# Altium PCB Atmega328P_Shield.PcbDoc
Units mm, origin at the board's own origin, x right, y up, seen from the top; angles counter-clockwise.
Board outline 41.91 x 28.96 mm, 2 copper layers (Top Layer, Bottom Layer); 12 components, 8 nets, 32 pads, 0 vias.
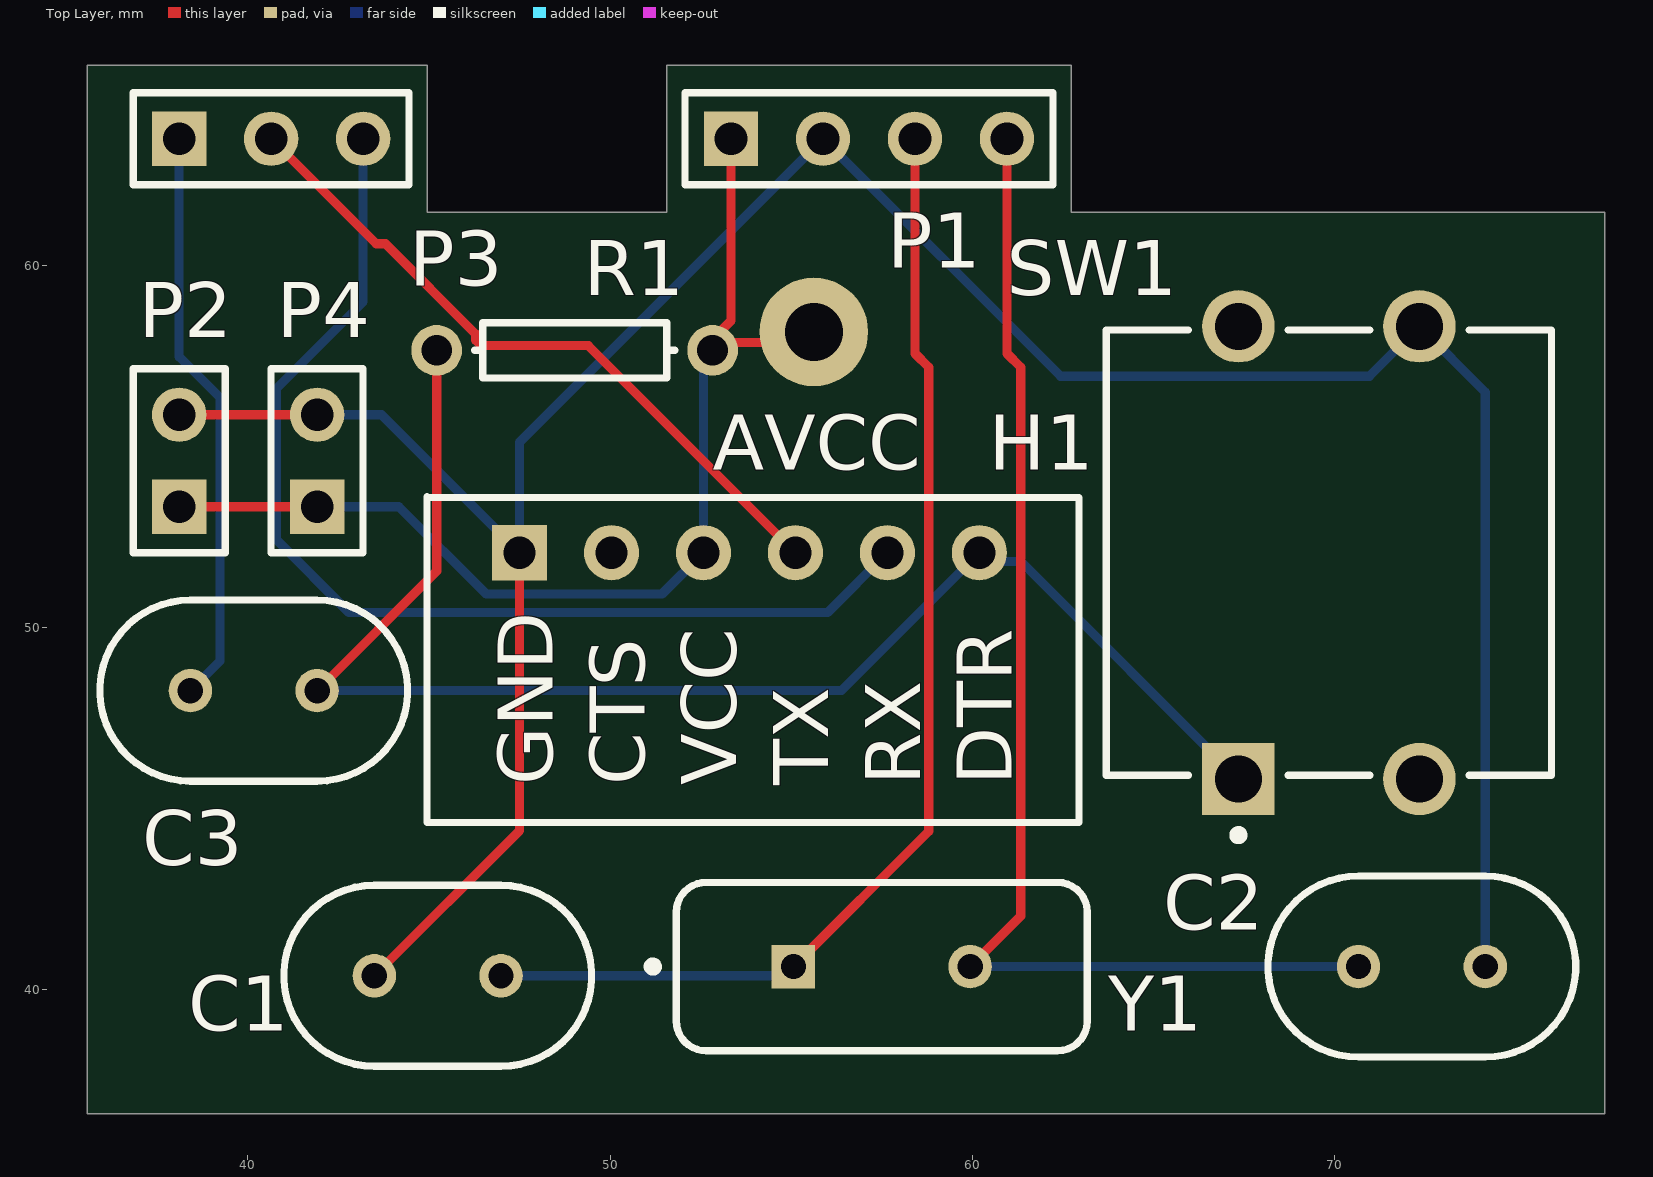
[diagram p0: Top Layer view]
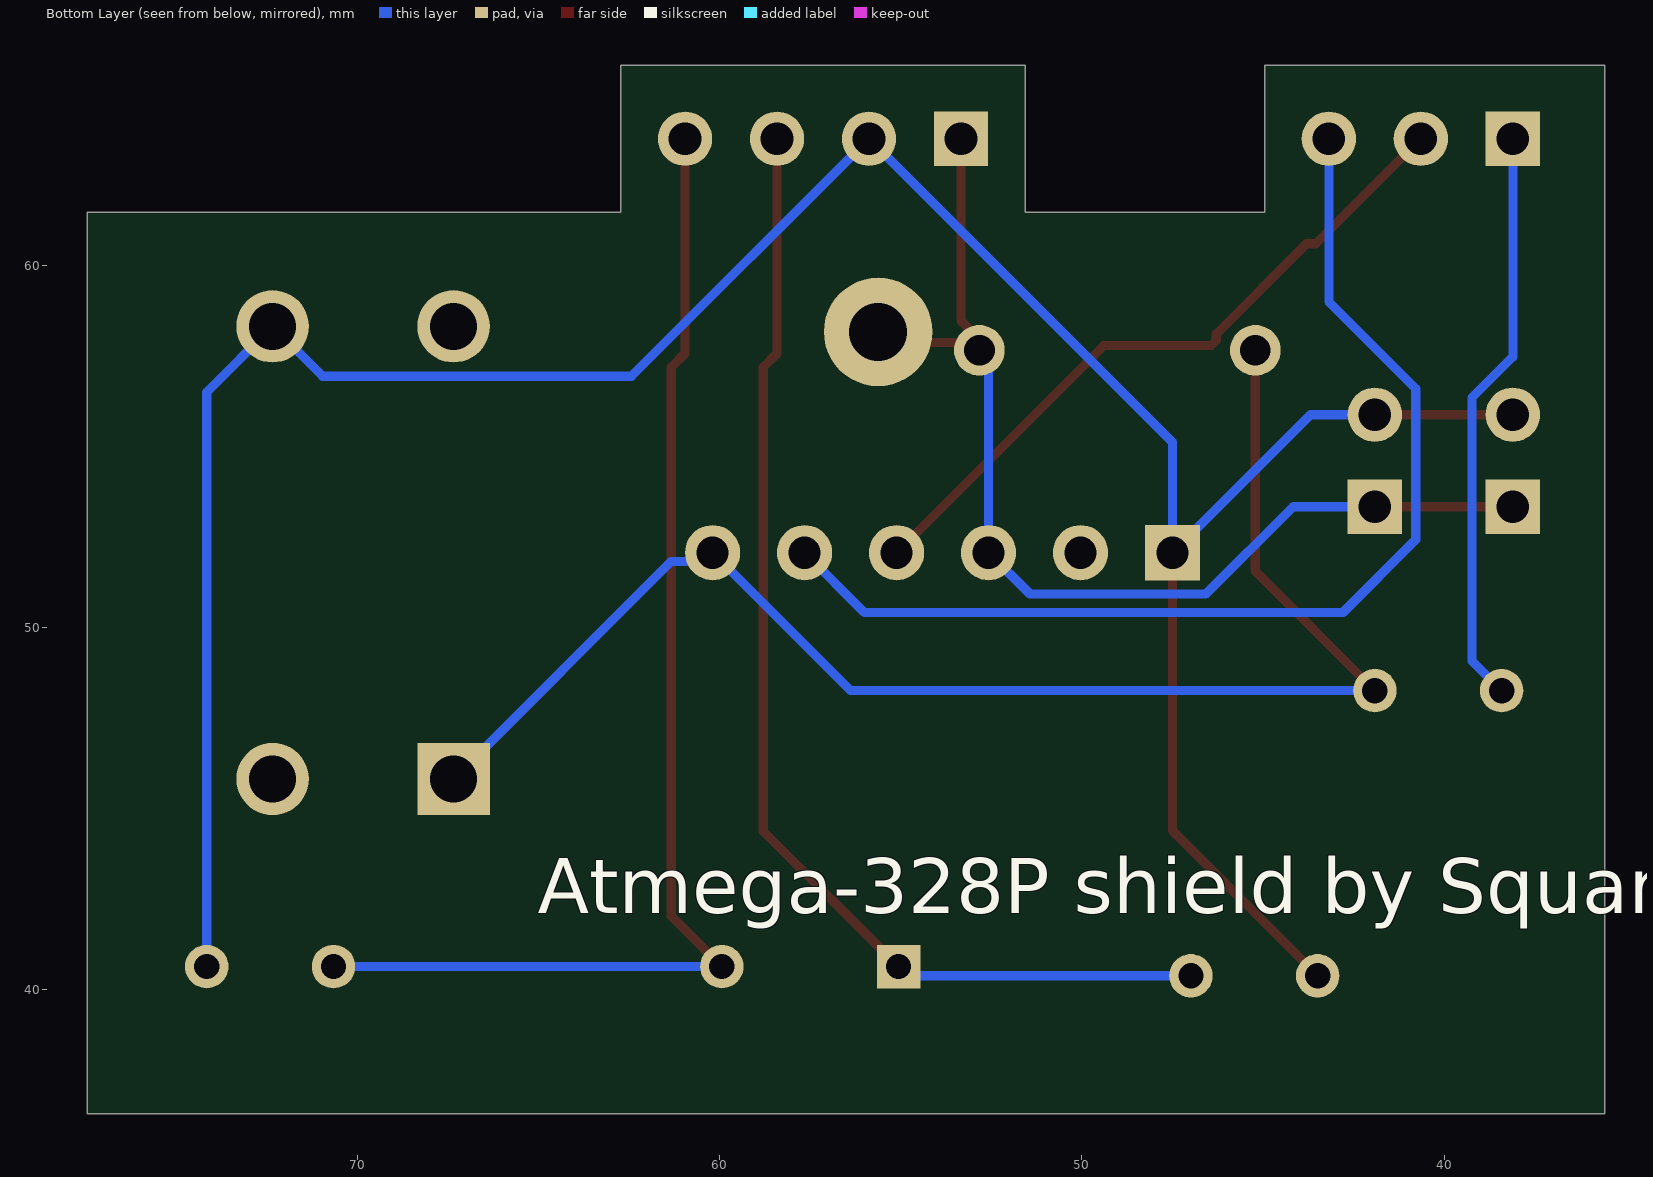
[diagram p1: Bottom Layer view, seen from below]

## Layer stack, top to bottom
Top Solder: solder mask 0.0102, Solder Resist, Dk 3.5
Top Layer: signal copper 0.0356
Dielectric 1: dielectric 0.32, FR-4, Dk 4.8
Bottom Layer: signal copper 0.0356
Bottom Solder: solder mask 0.0102, Solder Resist, Dk 3.5

## Board outline
35.56,36.576 35.56,65.532 44.958,65.532 44.958,61.468 51.562,61.468 51.562,65.532 62.738,65.532 62.738,61.468 77.47,61.468 77.47,36.576

## Design rules (kind name [scope] priority, off if disabled: settings)
Clearance [All] p1: gap=0.254 ignorepadtopadclearanceinfootprint=FALSE except(0: Arc-Hole Track-Hole SMDPad-Hole THPad-Hole Via-Hole Fill-Hole Poly-Hole Region-Hole Text-Hole)
PolygonConnect [All] p1: connectstyle=Relief reliefconductorwidth=0.254 reliefentries=4 polygonreliefangle="90 Angle" airgapwidth=0.254
RoomDefinition Atmega328P_Shield [InComponentClass('Atmega328P_Shield')] p1: confinementstyle=ConfineIn formatcopy=TRUE lockcomponents=FALSE outline 25.4,25.4 120.65,25.4 120.65,100.513 25.4,100.513
RoutingVias [All] p1: holewidth=0.711 width=1.27 viastyle="Through Hole" minholewidth=0.711 minwidth=1.27 maxholewidth=0.711 maxwidth=1.27
SolderMaskExpansion [All] p1: expansion=0.102 istentingtop=FALSE
Width [All] p1: maxlimit=0.254 minlimit=0.254 preferedwidth=0.254
30 further rules are at their usual default settings.

## Components (designator, comment, footprint, x,y, rotation, side; value= is the part's Value field where it differs from the comment)
AVCC "AVCC" TEST_POINT 55.626,58.166 r0 top (schematic designator TP1)
C1 "22pF" "Ceramic Capacitor" 43.49,40.386 r0 top
C2 "22pF" "Ceramic Capacitor" 74.168,40.64 r180 top
C3 "100nF" "Ceramic Capacitor" 41.91,48.26 r180 top
H1 "USB_TTL_6_socket" "TTL USB (6 SOCKETS)" 47.498,52.07 r90 top
P1 "crystal connection" HDR1X4 53.34,63.5 r0 top locked
P2 "Power rail" HDR1X2 38.1,53.34 r90 top locked
P3 "Serial comm" HDR1X3 38.1,63.5 r0 top locked
P4 "Power rail (offsetted)" HDR1X2 41.91,53.34 r90 top locked
R1 "Res1" AXIAL-0.3 49.022,57.658 r180 top value=10K
SW1 "FSM103" FP-FSM103-MFG 69.85,52.07 r270 top
Y1 "FOXSLF/160-20" FOX-FOXSLF160-20 57.504,40.64 r0 top

## Footprints (in the part's own frame and the unit in brackets; to place one, negate y for a bottom-side part, rotate by r counter-clockwise, add the part's x,y. Pads: shape width x height; smd on the part's side, far side on the other; paste and mask are expansions set on the pad)
AXIAL-0.3 [mm] "Axial Device, Thru-Hole; 2 Leads; 0.3 in Pin Spacing"
  round 1.4 hole 0.85: 1(-3.81,0) 2(3.81,0)
  silkscreen extent -2.77,-0.76 2.77,0.76
"Ceramic Capacitor" [mm]
  round 1.2 hole 0.7: 1(0,0) 2(3.5,0)
  silkscreen extent -2.5,-2.5 6,2.5
FOX-FOXSLF160-20 [mm] "THD, 2-Leads, Body 11.35x4.65mm"
  rect 1.2x1.2 hole 0.7: 1(-2.44,0)
  round 1.2 hole 0.7: 2(2.44,0)
  silkscreen extent -6.45,-2.32 5.68,2.32, body extent -5.67,-2.32 5.68,2.33, height 3.6
FP-FSM103-MFG [mm]
  rect 2x2 hole 1.3 paste-1000 mask+0: 1(6.25,-2.5)
  round 2 hole 1.3 paste-1000 mask+0: 2(-6.25,-2.5) 3(6.25,2.5) 4(-6.25,2.5)
  silkscreen extent -6.15,-6.15 7.92,6.15, body extent -7.35,-6.25 7.35,6.25, height 0.25
HDR1X2 [mm] "Connector; Header; 2 Position"
  rect 1.5x1.5 hole 0.9: 1(0,0)
  round 1.5 hole 0.9: 2(2.54,0)
  silkscreen extent -1.27,-1.27 3.81,1.27
HDR1X3 [mm] "Connector; Header; 3 Position"
  rect 1.5x1.5 hole 0.9: 1(0,0)
  round 1.5 hole 0.9: 2(2.54,0) 3(5.08,0)
  silkscreen extent -1.27,-1.27 6.35,1.27
HDR1X4 [mm] "Connector; Header; 4 Position"
  rect 1.5x1.5 hole 0.9: 1(0,0)
  round 1.5 hole 0.9: 2(2.54,0) 3(5.08,0) 4(7.62,0)
  silkscreen extent -1.27,-1.27 8.89,1.27
TEST_POINT [mm]
  round 3 hole 1.6: 1(0,0)
"TTL USB (6 SOCKETS)" [mil]
  rect 60x60 hole 35: 1(0,0)
  round 60 hole 35: 2(0,-100) 3(0,-200) 4(0,-300) 5(0,-400) 6(0,-500)
  silkscreen extent -293,-608 61,100

## Part data
AVCC: library part Testpoint, "Polyurethane Multi-Purpose Cream Adhesive, 10.3 oz Cartridge", Color=Red, Flammability Rating="UL94 V-0", Manufacturer="Keystone Electronics", Manufacturer Part Number=5010, Package Quantity=100, Supplier Part Number 1=36-5010-ND, Body Material=Bronze,PBT, Category=Connectors, ComponentLink1Description=https://datasheet.ciiva.com/11744/0900766b8009b7c7-11744920.pdf?src-supplier=RSComponents, ComponentLink1URL=https://datasheet.ciiva.com/11744/0900766b8009b7c7-11744920.pdf?src-supplier=RSComponents, ComponentLink2Description=https://datasheet.ciiva.com/16506/m60-2p60-16506972.pdf?src-supplier=Future+Electronics, ComponentLink2URL=https://datasheet.ciiva.com/16506/m60-2p60-16506972.pdf?src-supplier=Future+Electronics, ComponentLink3Description=https://datasheet.ciiva.com/16883/70182825-16883886.pdf?src-supplier=Allied+Electronics, ComponentLink3URL=https://datasheet.ciiva.com/16883/70182825-16883886.pdf?src-supplier=Allied+Electronics, ComponentLink4Description=https://datasheet.ciiva.com/1454/1703983-1454833.pdf?src-supplier=Element14, ComponentLink4URL=https://datasheet.ciiva.com/1454/1703983-1454833.pdf?src-supplier=Element14, ComponentLink5Description=https://datasheet.ciiva.com/22631/1703983-22631113.pdf?src-supplier=Element14, ComponentLink5URL=https://datasheet.ciiva.com/22631/1703983-22631113.pdf?src-supplier=Element14, ComponentLink6Description=https://datasheet.ciiva.com/2917/5010-2917626.pdf?src-supplier=Digi-Key, ComponentLink6URL=https://datasheet.ciiva.com/2917/5010-2917626.pdf?src-supplier=Digi-Key, Contact Material=Bronze, Contact Plating=Silver,Tin, Height=0.445inch, Hole Diameter=1.6mm, Housing Color=Red, Inside Diameter=1.78mm, Insulation Material=Nylon, Lead Free="Lead Free", Length=11.3mm, Material=Nylon,Bronze,Silver, Mount="Through Hole,PCB", Number of Ports=1, Orientation=Straight, Packaging=Bulk, Plating=Silver, Pricing 1="1=0.42000, 25=0.34080, 100=0.30150, 250=0.28304, 500=0.25230, 1000=0.19884, 2500=0.18180, 5000=0.17044 (USD)", REACH SVHC="No SVHC", RoHS=Yes, RoHS Compliant=Yes, Series=THM, Stock 1=546313, Supplier 1=Digi-Key, Termination="Through Hole"
C1 C2 C3: library part capacitor
H1: Supplier Part Number 1=1621310, Supplier 1=Rs
P1: library part "Header 4", "Header, 4-Pin", LatestRevisionDate=17-Jul-2002, LatestRevisionNote="Re-released for DXP Platform.", Publisher="Altium Limited"
P2 P4: library part "Header 2", "Header, 2-Pin", LatestRevisionDate=17-Jul-2002, LatestRevisionNote="Re-released for DXP Platform.", Publisher="Altium Limited"
P3: library part "Header 3", "Header, 3-Pin", LatestRevisionDate=17-Jul-2002, LatestRevisionNote="Re-released for DXP Platform.", Publisher="Altium Limited"
R1: "Resistor", LatestRevisionDate=17-Jul-2002, LatestRevisionNote="Re-released for DXP Platform.", PackageDescription="Axial Device, Thru-Hole; 2 Leads; 0.3 in Pin Spacing", PackageReference=AXIAL-0.3, Published=8-Jun-2000, Publisher="Altium Limited"
SW1: library part CMP-03407-000037-1, "SWITCH TACTILE SPST-NO 0.05A 24V", Actuator Color=Black, Contact Current Rating=50mA, Contact Resistance=100mR, Max Operating Temperature=85°C, Max Voltage Rating (DC)=12V, Min Operating Temperature=-35°C, Operating Force=1.57N, Package Quantity=400, Voltage Rating=24V, Actuator Length=3.4mm, Actuator Material=Polyester, Contact Material=Brass, Contact Plating=Silver, Current Rating=50mA, Depth=14.1mm, Electrical Life=100000Cycles, Illumination Type=Non-Illuminated, Length=12mm, Max Current Rating=50mA, Mechanical Life=100000Cycles, Mount="Through Hole", Orientation=Straight, Packaging="Loose Piece", Radiation Hardening=No, RoHS Compliant=Yes, Series="FSM100 ~ 104", Switch Function=Off-Mom, Switch Travel=0.3mm, Termination="PC Pins", Throw Configuration=SPST, Type=Switch, Voltage Rating (DC)=12V, Width=12mm
Y1: library part CMP-1749-00003-1, "Resistance Weld Thru-Hole Crystal, 16 MHz, -20 to 70 degC, 2-Pin THD, RoHS, Bulk", Case\Package=Axial, Max Operating Temperature="155 degC", Min Operating Temperature="-55 degC", Package Quantity=200, Power Rating="250 mW", Resistance="221 kohm", Tolerance=1%, Voltage Rating="250 V", ComponentLink1Description="Manufacturer URL", ComponentLink1URL=http://www.foxonline.com/, ComponentLink2Description=Datasheet, ComponentLink2URL=http://www.foxonline.com/pdfs/hc49slf.pdf, DatasheetVersion=Mar-15, Length="0.248 inch", Mount="Through Hole", PackageDescription="2-Pin Through Hole Device, Body 11.35 x 4.65 mm", PackageReference=FOXSLF160-20, Packaging=Bulk, RoHSCompliant=true

## Nets (pads, with @x,y where several pads share a name; then routed paths per layer and width w, separated by ;. In a path a pad name is that pad's centre, name@x,y a point inside that pad or via, vN(x,y) a via of type N, cw(c..) or ccw(c..) an arc to the next point about the centre after c; other vN are vias at no path point)
DTR: C3.1 H1.6 R1.2 SW1.1 | length 40.4
  Top Layer w0.254: C3.1 45.212,51.562 R1.2
  Bottom Layer w0.254: C3.1 56.388,48.26 H1.6 60.439,51.829 61.341,51.829 SW1.1
GND: C1.1 C2.1 H1.1 P1.2 P2.2 P4.2 SW1.4 | length 77.4
  Top Layer w0.254: P2.2 P4.2 ; C1.1 47.498,44.394 H1.1
  Bottom Layer w0.254: P4.2 43.688,55.88 H1.1 47.498,55.118 P1.2 62.441,56.939 70.969,56.939 SW1.4 74.168,56.502 C2.1
NetC1_2: C1.2 P1.3 Y1.1 | length 32.7
  Top Layer w0.254: Y1.1 58.801,44.377 58.801,57.189 58.42,57.57 P1.3
  Bottom Layer w0.254: C1.2 54.81,40.386 Y1.1
NetC2_2: C2.2 P1.4 Y1.2 | length 34.3
  Top Layer w0.254: Y1.2 61.341,42.037 61.341,57.189 60.96,57.57 P1.4
  Bottom Layer w0.254: Y1.2 C2.2
NetC3_2: C3.2 P3.1 | length 16
  Bottom Layer w0.254: P3.1 38.1,57.479 39.231,56.348 39.231,49.081 C3.2
RX: H1.5 P3.3 | length 30.5
  Bottom Layer w0.254: P3.3 43.18,58.998 40.779,56.597 40.779,52.432 42.792,50.419 56.007,50.419 H1.5
TX: H1.4 P3.2 | length 19.3
  Top Layer w0.254: P3.2 43.541,60.599 43.799,60.599 46.293,58.106 46.293,57.936 46.442,57.787 49.401,57.787 H1.4
VCC: AVCC.1 H1.3 P1.1 P2.1 P4.1 R1.1 | length 30.7
  Top Layer w0.254: P2.1 P4.1 ; P1.1 53.34,58.476 52.832,57.968 R1.1 53.051,57.877 55.337,57.877 AVCC.1
  Bottom Layer w0.254: P4.1 44.165,53.34 46.578,50.927 51.435,50.927 H1.3 52.578,57.094 52.832,57.348 R1.1
pads on no net: H1.2 SW1.2 SW1.3

## Silkscreen, mask and mechanical layers (free items; w line width, h text height)
Bottom Overlay:
  text "Atmega-328P shield by Square1a" at 65.024,42.115 h1.52
Mechanical 1:
  lines w0.2: 35.56,36.576 77.47,36.576 77.47,61.468 62.738,61.468 62.738,65.532 51.562,65.532 51.562,61.468 44.958,61.468 44.958,65.532 35.56,65.532 35.56,64.77 35.56,36.576

## Text inside footprints (layer, text, board x,y; h text height)
H1: Top Overlay "GND" at 48.419,45.649 h1.52 r90; Top Overlay "CTS" at 50.954,45.649 h1.52 r90; Top Overlay "VCC" at 53.489,45.649 h1.52 r90; Top Overlay "TX" at 56.024,45.649 h1.52 r90; Top Overlay "RX" at 58.559,45.649 h1.52 r90; Top Overlay "DTR" at 61.094,45.649 h1.52 r90